# EAGLE board Lighting Board (EAGLE 6.5.0)
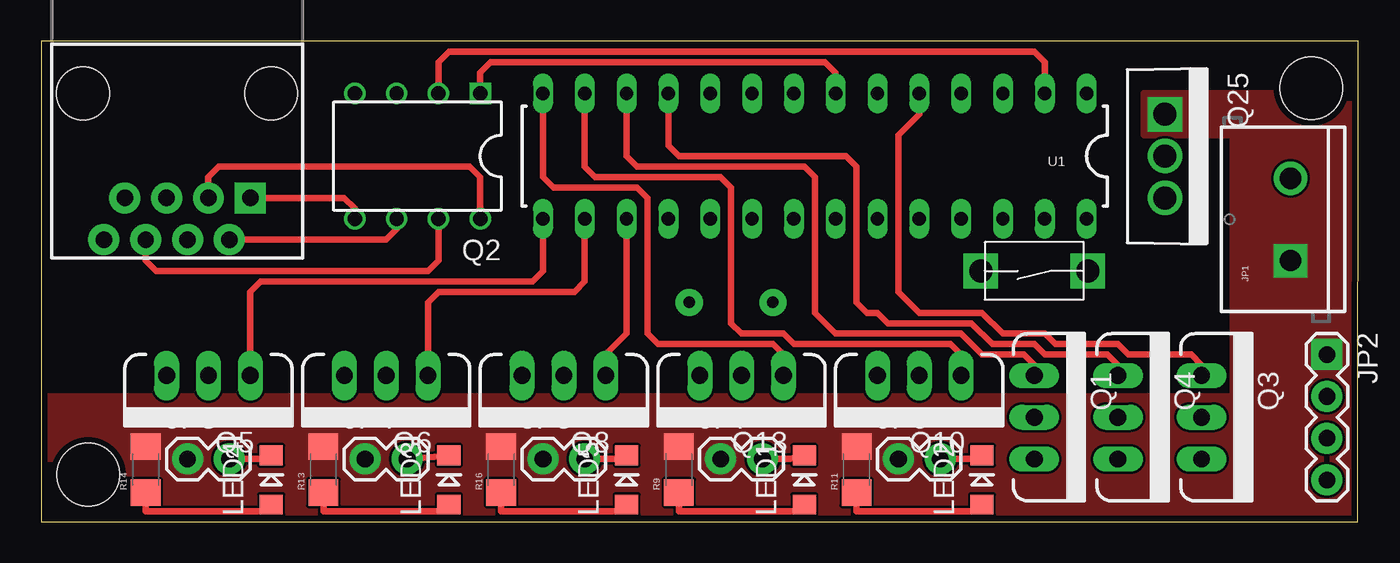
[diagram p0: board, top side]
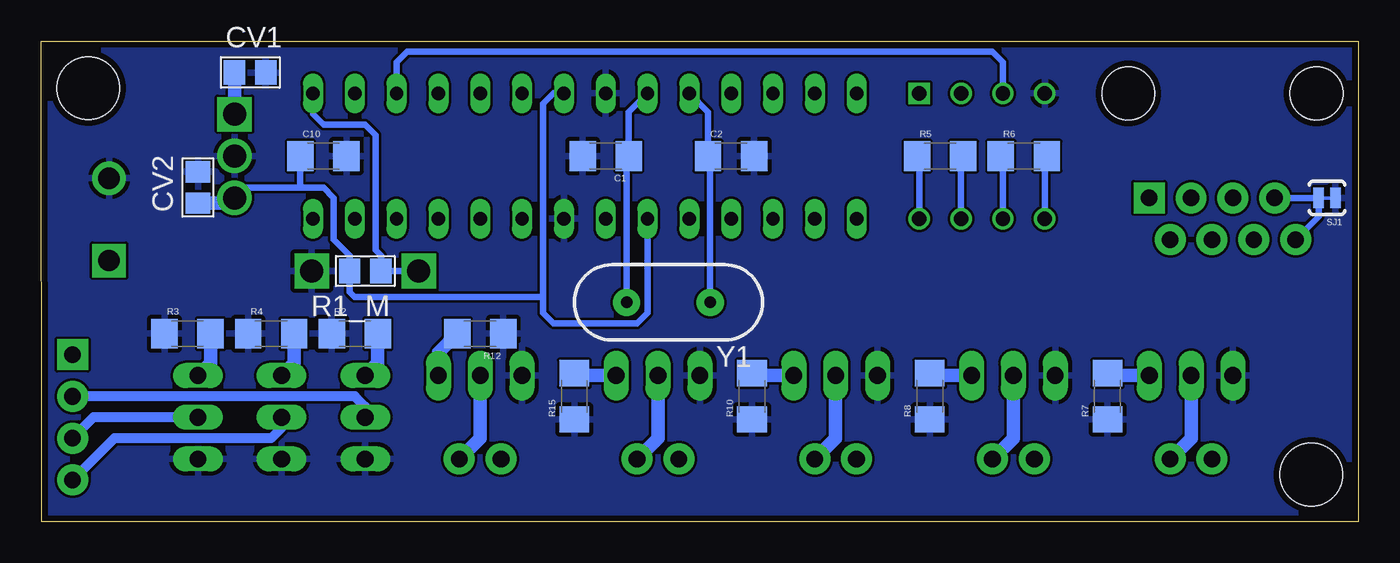
[diagram p1: board, bottom side, seen from below]

Size 80.01 x 29.21 mm. Coordinates in mm from the lower left corner, seen from the top.
Outline: 0,0 79.99,0 80.01,29.21 0,29.21 0,0
Copper layers (1*16): Top 0.0356mm / dielectric 1.5011mm / Bottom 0.0356mm
Design rules "LaenPCBOrder": minimum track width 6mil, minimum drill 13mil, track to track 6mil, track to pad 6mil, pad to pad 6mil, via to via 6mil, smd to smd 6mil, copper to edge 15mil, drill to drill 6mil, minimum pad ring 7mil, minimum via ring 7mil, stop-mask expansion 4mil, vias tented up to drill 0mil, thermal gap 10mil
Holes 3.81 mm at 2.86,2.86 77.15,26.35

## Footprints (pad centres in the part's own frame; a part is rotated, then mirrored left to right if it is on the bottom)
1206 = smd 1.6 x 1.8: 1 -1.4,0; 2 1.4,0
C_0805 = smd 1.3 x 1.5: 1 -0.95,0; 2 0.95,0
SCREWTERMINAL-5MM-2 = drill 1.3 pad 2.032 square: 1 0,0 | drill 1.3 pad 2.032: 2 5,0
1X04 = drill 1.016 pad 1.88 square: 1 0,0 | drill 1.016 pad 1.88: 2 2.54,0; 3 5.08,0; 4 7.62,0
1X02 = drill 1.016 pad 1.88: 1 0,0; 2 2.54,0
LED-1206 = smd 1.2 x 1.4: A -1.5,0; C 1.5,0
J_TOGGLE = drill 1.4 square: P$1 -3.25,0; P$2 3.25,0
TO220V = drill 1.016 long: 1 -2.54,0; 2 0,0; 3 2.54,0
DIP8 = drill 0.864 square: 1 -3.81,-3.81 | drill 0.864: 2 -1.27,-3.81; 3 1.27,-3.81; 4 3.81,-3.81; 5 3.81,3.81; 6 1.27,3.81; 7 -1.27,3.81; 8 -3.81,3.81
TO-220 = drill 1.397 square: 1 -2.54,0 | drill 1.397: 2 0,0; 3 2.54,0
R_0805 = smd 1.3 x 1.5: 1 -0.95,0; 2 0.95,0
SJ_2S-TRACE = smd 0.635 x 1.27: 1 -0.508,0; 2 0.508,0
DIL28-3 = drill 0.813 long: 1 -16.51,-3.81; 2 -13.97,-3.81; 3 -11.43,-3.81; 4 -8.89,-3.81; 5 -6.35,-3.81; 6 -3.81,-3.81; 7 -1.27,-3.81; 8 1.27,-3.81; 9 3.81,-3.81; 10 6.35,-3.81; 11 8.89,-3.81; 12 11.43,-3.81; 13 13.97,-3.81; 14 16.51,-3.81; 15 16.51,3.81; 16 13.97,3.81; 17 11.43,3.81; 18 8.89,3.81; 19 6.35,3.81; 20 3.81,3.81; 21 1.27,3.81; 22 -1.27,3.81; 23 -3.81,3.81; 24 -6.35,3.81; 25 -8.89,3.81; 26 -11.43,3.81; 27 -13.97,3.81; 28 -16.51,3.81
RJ45-8 = drill 1 pad 1.88 square: 1 -4.445,6.35 | drill 1 pad 1.88: 2 -3.175,8.89; 3 -1.905,6.35; 4 -0.635,8.89; 5 0.635,6.35; 6 1.905,8.89; 7 3.175,6.35; 8 4.445,8.89 | hole 3.2: -5.715,0; 5.715,0
HC49US = drill 0.7 pad 1.651: 1 -2.54,0; 2 2.54,0

## Placement (x,y rotation side)
C1  0.1uF  [1206]  45.72,22.23 180 bottom
C2  0.1uF  [1206]  38.1,22.23 0 bottom
C10  .1uF  [1206]  62.87,22.23 0 bottom
CV1  [C_0805]  67.31,27.3 0 bottom
CV2  [C_0805]  70.48,20.32 90 bottom
JP1  M025MM  [SCREWTERMINAL-5MM-2]  75.88,15.88 90 top
JP2  [1X04]  78.11,10.16 270 top
JP3  M02PTH  [1X02]  8.89,3.81 0 top
JP4  M02PTH  [1X02]  19.68,3.81 0 top
JP5  M02PTH  [1X02]  30.48,3.81 0 top
JP6  M02PTH  [1X02]  52.07,3.81 0 top
JP7  M02PTH  [1X02]  41.27,3.81 0 top
LED1  [LED-1206]  46.35,2.54 90 top
LED2  [LED-1206]  57.15,2.54 90 top
LED3  [LED-1206]  24.77,2.54 90 top
LED4  [LED-1206]  13.97,2.54 90 top
LED5  [LED-1206]  35.56,2.54 90 top
MS  J_MC32857  [J_TOGGLE]  60.33,15.24 180 top
Q1  MOSFET-NCHANNELFQP30N06L  [TO220V]  60.33,6.35 270 top
Q2  Q_LTC490  [DIP8]  22.86,22.23 180 top
Q3  MOSFET-NCHANNELFQP30N06L  [TO220V]  70.48,6.35 270 top
Q4  MOSFET-NCHANNELFQP30N06L  [TO220V]  65.41,6.35 270 top
Q5  MOSFET-NCHANNELFQP30N06L  [TO220V]  10.16,8.89 180 top
Q6  MOSFET-NCHANNELFQP30N06L  [TO220V]  20.95,8.89 180 top
Q8  MOSFET-NCHANNELFQP30N06L  [TO220V]  31.75,8.89 180 top
Q10  MOSFET-NCHANNELFQP30N06L  [TO220V]  53.34,8.89 180 top
Q13  MOSFET-NCHANNELFQP30N06L  [TO220V]  42.55,8.89 180 top
Q25  LDO  [TO-220]  68.26,22.23 270 top
R1_M  200  [R_0805]  60.33,15.24 180 bottom
R2  1k  [1206]  60.96,11.43 0 bottom
R3  1k  [1206]  71.12,11.43 0 bottom
R4  1k  [1206]  66.04,11.43 0 bottom
R5  120 Ohm  [1206]  25.4,22.23 0 bottom
R6  120 Ohm  [1206]  20.32,22.23 0 bottom
R7  1k  [1206]  15.24,7.62 90 bottom
R8  1k  [1206]  26.04,7.62 90 bottom
R9  [1206]  38.73,3.17 90 top
R10  1k  [1206]  36.83,7.62 90 bottom
R11  [1206]  49.53,3.17 90 top
R12  1k  [1206]  53.34,11.43 180 bottom
R13  200  [1206]  17.14,3.17 90 top
R14  200  [1206]  6.35,3.17 90 top
R15  1k  [1206]  47.62,7.62 90 bottom
R16  200  [1206]  27.94,3.17 90 top
SJ1  SOLDERJUMPERTRACE  [SJ_2S-TRACE]  1.91,19.68 180 bottom
U1  ATMEGA328P_PDIP  [DIL28-3]  46.99,22.23 180 top
U$1  RJ45-8PTH  [RJ45-8]  8.26,26.04 180 top
Y1  [HC49US]  41.91,13.34 180 bottom

## Library data of the parts
C1 C2 R2-R16 SJ1 = SparkFun-Passives
C10 = SparkFun-Retired; PROD_ID: CAP-10009; VALUE: 2.2uF
CV1 CV2 R1_M = Lib_Passive
JP1-JP7 U$1 = SparkFun-Connectors
LED1-LED5 = LilyPad-Wearables
MS Q2 Q25 = PCB0M1
Q1 Q3-Q6 Q8 Q10 Q13 = SparkFun-DiscreteSemi; PROD_ID: TRANS-10060
U1 = SparkFun-DigitalIC
Y1 = SparkFun-FreqCtrl

## Nets
D1: Q10.1 R12.2 U1.13
D2: Q13.1 R15.2 U1.14
GND: C1.2 C2.2 C10.2 CV1.2 CV2.2 JP1.2 MS.P$1 Q1.3 Q2.4 Q3.3 Q4.3 Q5.3 Q6.3 Q8.3 Q10.3 Q13.3 Q25.2 R2.1 R3.1 R4.1 R7.1 R8.1 R10.1 R12.1 R15.1 SJ1.1 U1.8 U1.22
N$1: Q2.5 R6.2 U$1.1
N$2: C2.1 U1.10 Y1.1
N$4: LED1.A R9.1
N$5: LED2.A R11.1
N$6: LED3.A R13.1
N$7: LED4.A R14.1
N$8: LED5.A R16.1
N$9: Q2.6 R6.1 U$1.2
N$10: Q2.7 R5.2 U$1.6
N$11: Q2.8 R5.1 U$1.3
N$12: SJ1.2 U$1.7 U$1.8
N$13: C1.1 U1.9 Y1.2
N$15: JP2.2 Q1.2
N$16: JP2.3 Q3.2
N$17: JP2.4 Q4.2
N$88: MS.P$2 R1_M.1 U1.1
N%2: JP4.2 LED3.C Q6.2
N%3: JP3.2 LED4.C Q5.2
N%106: JP5.2 LED5.C Q8.2
N%107: JP6.2 LED2.C Q10.2
N%110: JP7.2 LED1.C Q13.2
PWM1: Q3.1 R3.2 U1.5
PWM2: Q4.1 R4.2 U1.11
PWM3: Q1.1 R2.2 U1.12
PWM4: Q5.1 R7.2 U1.15
PWM5: Q6.1 R8.2 U1.16
PWM6: Q8.1 R10.2 U1.17
RXD: Q2.2 U1.2
TXD: Q2.3 U1.3
V5: C10.1 CV2.1 Q2.1 Q25.3 R1_M.2 U1.7 U1.20
VIN: CV1.1 JP1.1 JP2.1 JP3.1 JP4.1 JP5.1 JP6.1 JP7.1 Q25.1 R9.2 R11.2 R13.2 R14.2 R16.2

## Tracks (layer width: path | path; a pad name or v marks a point on that pad's centre or on a via)
D1
  Top 0.406: U1.13 33.02,21.59 33.66,20.95 41.27,20.95 41.91,20.32 41.91,12.06 42.55,11.43 45.09,11.43 45.72,10.79 55.24,10.79 55.88,10.16 Q10.1
  Bottom 0.813: 55.88,8.38 Q10.1 55.88,10.29 R12.2
D2
  Top 0.406: U1.14 30.48,20.95 31.11,20.32 36.2,20.32 36.83,19.68 36.83,11.43 37.47,10.79 44.45,10.79 45.09,10.16 Q13.1
  Bottom 0.813: Q13.1 47.49,8.89 R15.2
GND
  pour Bottom: 0,0 80.01,0 80.01,29.21 0,29.21
N$1
  Top 0.406: Q2.5 19.05,19.05 18.41,19.68 U$1.1
  Bottom 0.406: R6.2 19.05,22.23 Q2.5
N$2
  Bottom 0.406: 39.37,21.59 39.5,21.59 C2.1 | C2.1 39.5,24.89 U1.10 | Y1.1 39.37,22.09 C2.1
N$4
  Top 0.406: LED1.A 45.95,0.64 38.73,0.64 R9.1
N$5
  Top 0.406: LED2.A 56.74,0.64 49.53,0.64 R11.1
N$6
  Top 0.406: LED3.A 24.36,0.64 17.14,0.64 R13.1
N$7
  Top 0.406: LED4.A 13.56,0.64 6.35,0.64 R14.1
N$8
  Top 0.406: R16.1 27.94,0.64 35.56,0.64 LED5.A
N$9
  Top 0.406: Q2.6 21.59,17.78 20.95,17.14 U$1.2
  Bottom 0.406: R6.1 21.59,22.23 Q2.6
N$10
  Top 0.406: U$1.6 6.35,15.88 6.99,15.24 23.5,15.24 24.13,15.88 Q2.7
  Bottom 0.406: R5.2 24.13,22.23 Q2.7
N$11
  Top 0.406: U$1.3 10.16,20.95 10.79,21.59 26.04,21.59 26.67,20.95 Q2.8
  Bottom 0.406: R5.1 26.67,22.23 Q2.8
N$12
  Bottom 0.406: U$1.8 2.41,18.54 SJ1.2 U$1.7
N$13
  Bottom 0.406: U1.9 44.32,24.89 C1.1 44.45,22.09 Y1.2
N$15
  Bottom 0.61: Q1.2 60.33,6.99 60.96,7.62 JP2.2
N$16
  Bottom 0.61: Q3.2 76.83,6.35 JP2.3
N$17
  Bottom 0.61: Q4.2 65.41,5.71 66.04,5.08 75.56,5.08 JP2.4
N$88
  Bottom 0.406: MS.P$2 R1_M.1 59.38,16.2 59.69,16.51 59.69,23.5 60.33,24.13 62.87,24.13 63.5,24.77 U1.1
N%2
  Top 0.406: LED3.C 22.63,3.81 JP4.2
  Bottom 0.813: Q6.2 20.95,5.08 JP4.2
N%3
  Top 0.406: LED4.C 14.38,3.81 JP3.2
  Bottom 0.813: Q5.2 10.16,5.08 JP3.2
N%106
  Top 0.406: LED5.C 35.33,3.81 JP5.2
  Bottom 0.813: Q8.2 31.75,5.08 JP5.2
N%107
  Top 0.406: LED2.C 56.92,3.81 JP6.2
  Bottom 0.813: Q10.2 53.34,5.08 JP6.2
N%110
  Top 0.406: LED1.C 45.49,3.81 JP7.2
  Bottom 0.813: Q13.2 42.55,5.08 JP7.2
PWM1
  Top 0.406: U1.5 53.34,24.77 52.07,23.5 52.07,13.97 53.34,12.7 57.15,12.7 58.42,11.43 60.96,11.43 61.59,10.79 65.41,10.79 66.04,10.16 69.85,10.16 70.48,9.53 Q3.1
  Bottom 0.813: R3.2 69.72,9.65 Q3.1
PWM2
  Top 0.406: U1.11 38.1,22.86 38.73,22.23 48.9,22.23 49.53,21.59 49.53,13.34 50.16,12.7 50.8,12.7 51.44,12.06 56.52,12.06 57.78,10.79 60.33,10.79 60.96,10.16 64.77,10.16 65.41,9.53 Q4.1
  Bottom 0.813: R4.2 64.64,9.65 Q4.1
PWM3
  Top 0.406: U1.12 35.56,22.23 36.2,21.59 46.35,21.59 46.99,20.95 46.99,12.7 48.26,11.43 55.88,11.43 57.15,10.16 59.69,10.16 60.33,9.53 Q1.1
  Bottom 0.813: R2.2 59.56,9.65 Q1.1
PWM4
  Top 0.406: U1.15 30.48,15.24 29.84,14.61 13.34,14.61 12.7,13.97 Q5.1
  Bottom 0.813: Q5.1 15.11,8.89 R7.2
PWM5
  Top 0.406: U1.16 33.02,14.61 32.38,13.97 24.13,13.97 23.5,13.34 Q6.1
  Bottom 0.813: Q6.1 25.91,8.89 R8.2
PWM6
  Top 0.406: U1.17 35.56,11.43 34.29,10.16 Q8.1
  Bottom 0.813: Q8.1 36.06,8.89 R10.2
RXD
  Top 0.406: U1.2 60.96,27.94 60.33,28.57 24.77,28.57 24.13,27.94 Q2.2
TXD
  Bottom 0.406: U1.3 58.42,27.94 57.78,28.57 22.23,28.57 21.59,27.94 Q2.3
V5
  Top 0.406: U1.7 48.26,27.3 47.62,27.94 27.3,27.94 26.67,27.3 Q2.1
  Bottom 0.406: U1.20 43.18,12.7 43.81,12.06 48.9,12.06 49.53,12.7 49.53,13.65 | 49.53,13.65 49.53,25.4 48.9,26.04 U1.7 | 64.14,20.32 62.87,20.32 62.23,19.68 62.23,17.14 61.27,16.19 R1_M.2 61.27,13.97 60.96,13.65 49.53,13.65 | 64.14,20.32 67.63,20.32 Q25.3 | C10.1 64.27,20.45 64.14,20.32
  Bottom 0.813: CV2.1 68.58,19.37 Q25.3
VIN
  Bottom 0.813: CV1.1 68.26,25.08 Q25.1
  pour Top (no thermals): 0,7.62 72.39,7.62 72.39,26.04 80.01,26.04 80.01,0 0,0
  pour Top (no thermals): 72.39,26.04 66.99,26.04 66.99,23.5 72.39,23.5